# EAGLE board Drone (EAGLE 9.6.2)
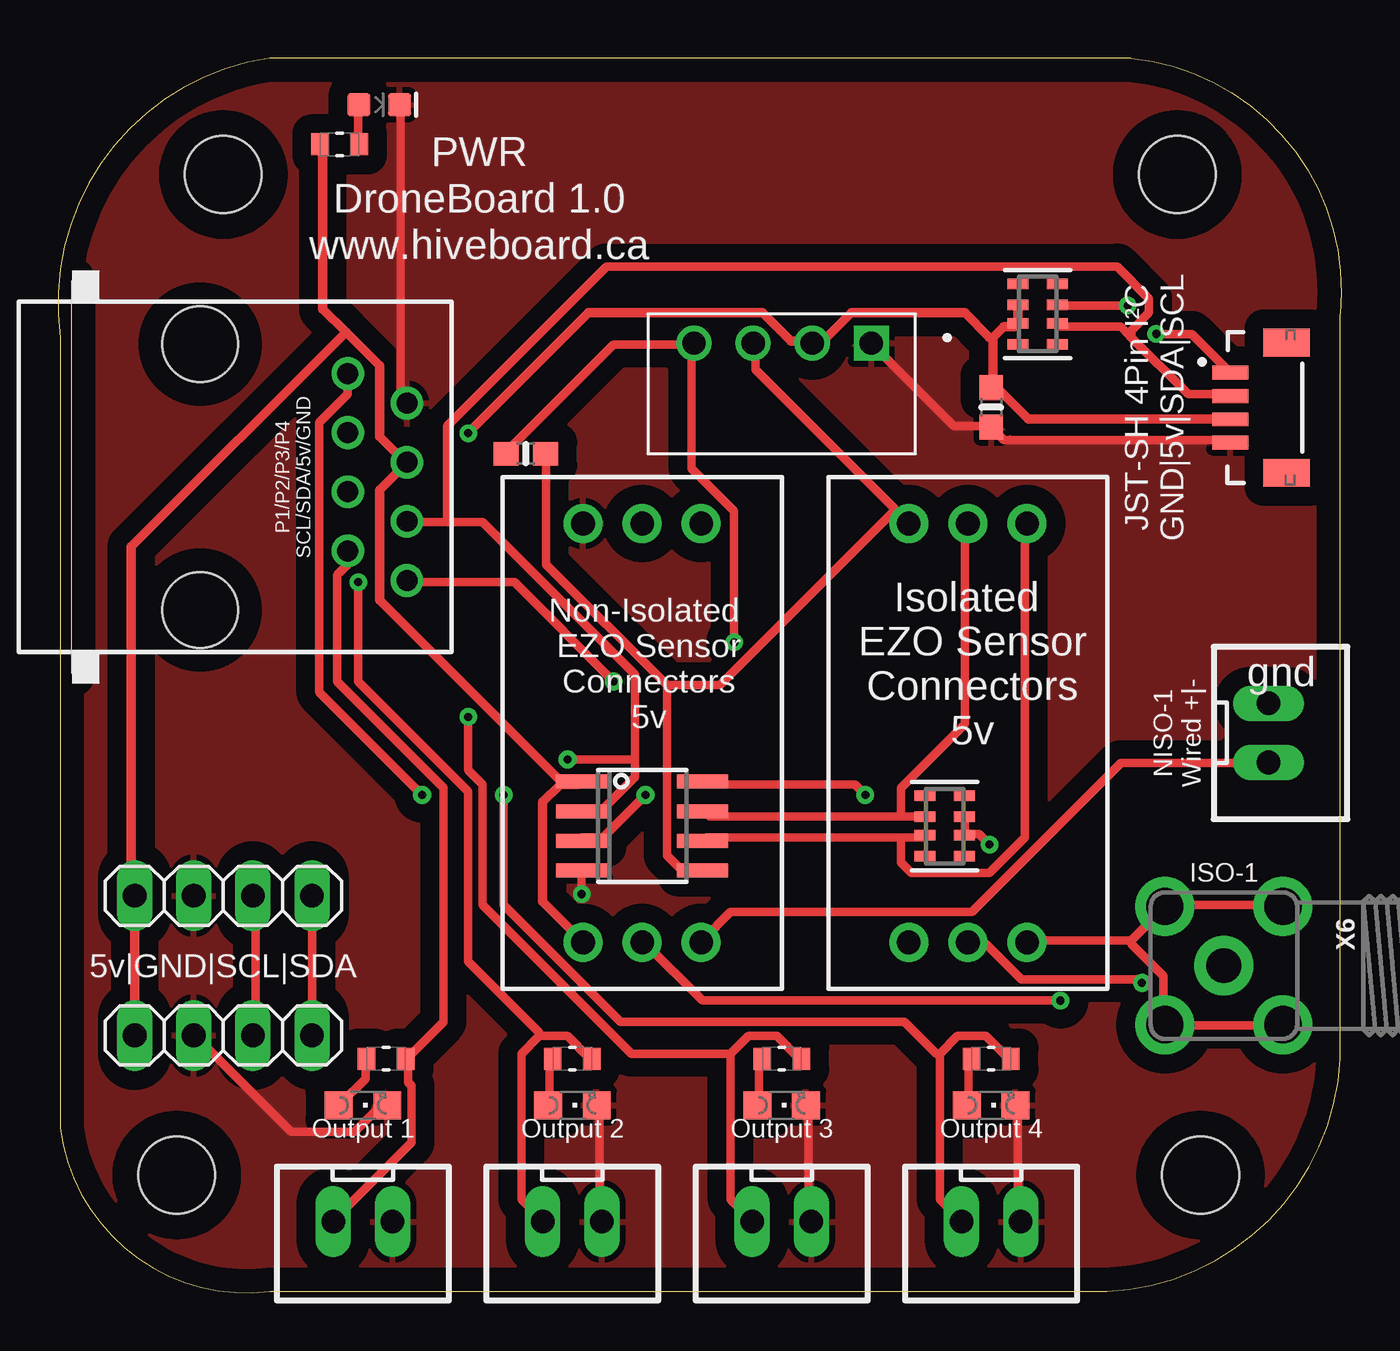
[diagram p0: board, top side]
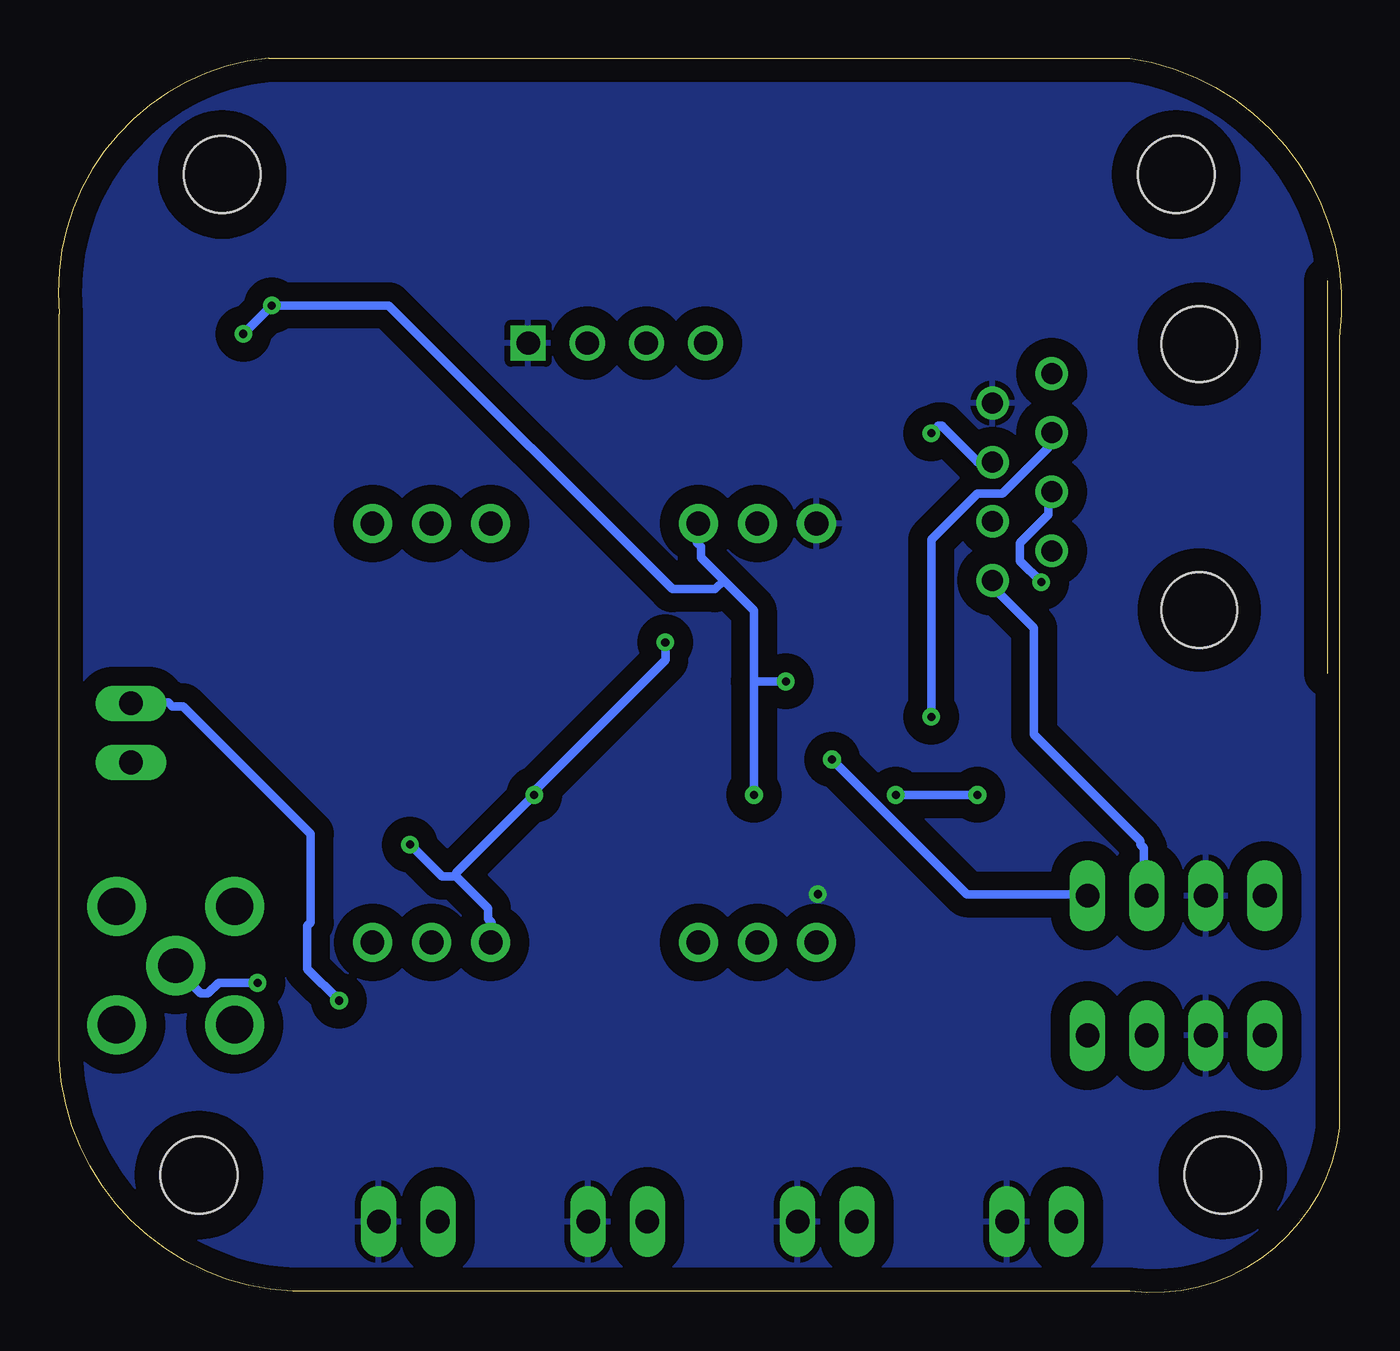
[diagram p1: board, bottom side, seen from below]

Size 55.15 x 53.06 mm. Coordinates in mm from the lower left corner, seen from the top.
Outline: 9.1,0.06 44.1,0.06 arc90 55.1,10.06 55.1,42.06 arc90 46.1,53.06 9.1,53.06 arc90 0.1,41.06 0.1,7.06 arc90 9.1,0.06
Copper layers (1*16): Top 0.035mm / dielectric 1.5mm / Bottom 0.035mm
Design rules "default *": minimum track width 6mil, minimum drill 0.35mm, track to track 6mil, track to pad 6mil, pad to pad 6mil, via to via 6mil, smd to smd 6mil, copper to edge 40mil, drill to drill 6mil, minimum pad ring 10mil, minimum via ring 8mil, stop-mask expansion 4mil, vias tented up to drill 0mil, thermal gap 10mil
Net classes: 0 default: width 0.356 mm, drill 0.102 mm, clearance 0.254 mm; 1 highpower: width 0.356 mm, drill 0.356 mm; 2 12v: width 0.457 mm, drill 0.102 mm, clearance 0.254 mm; 3 5v: width 0.406 mm, drill 0.102 mm, clearance 0.254 mm; 4 3.3v: width 0.406 mm, drill 0.102 mm, clearance 0.254 mm; 5 i2c: width 0.356 mm, drill 0.102 mm, clearance 0.254 mm; 6 GPIO: width 0.356 mm, drill 0.102 mm, clearance 0.254 mm; 8 New Class: drill 0.102 mm, clearance 0.152 mm

## Footprints (pad centres in the part's own frame; a part is rotated, then mirrored left to right if it is on the bottom)
RESC1608X60N = smd 0.762 x 0.94: 1 -0.838,0; 2 0.838,0
0603-NO = smd 1.075 x 1: 1 -0.85,0; 2 0.85,0
STAND-OFF = hole 3.302: 0,0
JST04_1MM_VERT = smd 0.6 x 1.55: 1 -1.478,0.775; 2 -0.478,0.775; 3 0.522,0.775; 4 1.522,0.775 | smd 1.2 x 2: NC1 -2.778,3.2; NC2 2.822,3.2
1X03-CLEANBIG = drill 1.016 pad 1.676: 1 -2.54,0; 2 0,0; 3 2.54,0
1X04 = drill 1.016 long: 1 -3.81,0; 2 -1.27,0; 3 1.27,0; 4 3.81,0
LED-0603 = smd 1 x 1: A -0.877,0; C 0.877,0
CHIPLED_0805 = smd 1.2 x 1.2: A 0,-1.05; C 0,1.05
CONV_RFM-0505S = drill 1 square: 1 -3.85,-1.75 | drill 1: 2 -1.31,-1.75; 3 1.23,-1.75; 4 3.77,-1.75
RJ45-NO-SHIELD = drill 0.9 pad 1.4: 1 -4.445,6.35; 2 -3.175,8.89; 3 -1.905,6.35; 4 -0.635,8.89; 5 0.635,6.35; 6 1.905,8.89; 7 3.175,6.35; 8 4.445,8.89 | hole 3.251: -5.715,0; 5.715,0
RESPACK_4X0603 = smd 0.45 x 0.9: 1 -1.3,-0.85; 2 -0.4,-0.85; 3 0.4,-0.85; 4 1.3,-0.85; 5 1.3,0.85; 6 0.4,0.85; 7 -0.4,0.85; 8 -1.3,0.85
JST-XH-02-PACKAGE-LONG-PAD = drill 1.016 long: 1 -1.27,0; 2 1.27,0
SMA90_DIP = drill 1.5 pad 2.54: ANTENNA 0,0 | drill 1.6 pad 2.54: GND1 -2.54,2.54; GND2 2.54,2.54; GND3 -2.54,-2.54; GND4 2.54,-2.54
SOIC8_150MIL = smd 0.6 x 2.2: 1 -1.905,-2.6; 2 -0.635,-2.6; 3 0.635,-2.6; 4 1.905,-2.6; 5 1.905,2.6; 6 0.635,2.6; 7 -0.635,2.6; 8 -1.905,2.6

## Placement (x,y rotation side)
12V  330R  [RESC1608X60N]  12.1,49.36 0 top
C6  0.1uF  [0603-NO]  20.1,36.06 0 top
C7  0.1uF  [0603-NO]  40.1,38.06 270 top
H5  STAND-OFF  [STAND-OFF]  7.1,48.06 0 top
H6  STAND-OFF  [STAND-OFF]  5.1,5.06 0 top
H7  STAND-OFF  [STAND-OFF]  49.1,5.06 0 top
H8  STAND-OFF  [STAND-OFF]  48.1,48.06 0 top
J4  Vertical Qwiic Connector  [JST04_1MM_VERT]  49.6,38.06 270 top
JP1  [1X03-CLEANBIG]  25.1,15.06 0 top
JP2  [1X04]  7.1,17.06 180 top
JP3  [1X03-CLEANBIG]  25.1,33.06 180 top
JP4  [1X04]  7.1,11.06 180 top
JP7  [1X03-CLEANBIG]  39.1,33.06 180 top
JP8  [1X03-CLEANBIG]  39.1,15.06 0 top
LED4  Red  [LED-0603]  13.8,51.06 0 top
LED11  BLUE  [CHIPLED_0805]  13.1,8.06 270 top
LED12  GREEN  [CHIPLED_0805]  22.1,8.06 270 top
LED13  Yellow  [CHIPLED_0805]  31.1,8.06 270 top
LED14  RED  [CHIPLED_0805]  40.1,8.06 270 top
PS1  RFM-0505S  [CONV_RFM-0505S]  31.1,39.06 180 top
PUMPBOX-2  RJ45-6L-B  [RJ45-NO-SHIELD]  6.1,35.06 270 top
R9  10K  [RESPACK_4X0603]  42.1,42.06 90 top
R10  10K  [RESPACK_4X0603]  38.1,20.06 270 top
R24  330R  [RESC1608X60N]  14.1,10.06 180 top
R25  330R  [RESC1608X60N]  22.1,10.06 180 top
R26  330R  [RESC1608X60N]  31.1,10.06 180 top
R27  330R  [RESC1608X60N]  40.1,10.06 180 top
X2  JST-XH-02-PIN-LONG-PAD  [JST-XH-02-PACKAGE-LONG-PAD]  13.1,3.06 180 top
X3  JST-XH-02-PIN-LONG-PAD  [JST-XH-02-PACKAGE-LONG-PAD]  22.1,3.06 180 top
X4  JST-XH-02-PIN-LONG-PAD  [JST-XH-02-PACKAGE-LONG-PAD]  31.1,3.06 180 top
X5  JST-XH-02-PIN-LONG-PAD  [JST-XH-02-PACKAGE-LONG-PAD]  40.1,3.06 180 top
X6  [SMA90_DIP]  50.1,14.06 270 top
X11  jst-xh-2  [JST-XH-02-PACKAGE-LONG-PAD]  52.02,24.06 270 top
X13  ISO154X  [SOIC8_150MIL]  25.1,20.06 270 top

## Library data of the parts
12V R24-R27 = Multicomp; MPN: MC0.063W06031%330R; OC_FARNELL: 9331018; OC_NEWARK: -; SUPPLIER: Multicomp; TOLERANCE: ±1%; WATTAGE: 1/16 W
C6 C7 R9 R10 = microbuilder
H5-H8 = SparkFun-Hardware
J4 = SparkFun-Connectors; PROD_ID: CONN-14483
JP1 JP3 JP7 JP8 LED11-LED14 X6 = adafruit
JP2 JP4 = pinhead
LED4 = SparkFun-LED; PROD_ID: DIO-16511
PS1 = RFM-0505S; AVAILABILITY: In Stock; DESCRIPTION: 1W DC/DC-Converter 'ECONOLINE' SIP4 1kV unreg; MF: Recom Power; MP: RFM-0505S; PACKAGE: SIP-4 Recom Power; PRICE: None; PURCHASE-URL: https://pricing.snapeda.com/search/part/RFM-0505S/?ref=eda
PUMPBOX-2 = con-tycoelectronics; MPN: RJ45-6L-B; OC_FARNELL: unknown; OC_NEWARK: 16R6090
X2-X5 X11 = Rembrandt Electronics - JST XH Connectors v1-0
X13 = adafruit_power

## Nets
12V-1: PUMPBOX-2.7 R24.1 X2.2
12V-2: PUMPBOX-2.5 R25.1 X3.2
12V-3: PUMPBOX-2.3 R26.1 X4.2
12V-4: PUMPBOX-2.1 R27.1 X5.2
+5V [5v]: 12V.1 C7.1 J4.3 JP1.1 JP2.4 JP4.4 PS1.2 PUMPBOX-2.4 R9.6 R9.7 X13.1
GND: C7.2 J4.4 JP2.3 JP3.3 JP4.3 LED4.C LED11.C LED12.C LED13.C LED14.C PS1.1 PUMPBOX-2.2 X2.1 X3.1 X4.1 X5.1 X13.4
ISO-1-5V: C6.1 JP8.1 PS1.4 R10.6 R10.7 X13.8
ISO-GND-1: C6.2 JP7.3 PS1.3 X13.5
N$1: JP1.2 X11.1
N$2: JP3.2
N$3: JP1.3 X11.2
N$14: JP8.3 X6.GND1 X6.GND2 X6.GND3 X6.GND4
N$16: JP8.2 X6.ANTENNA
N$47: 12V.2 LED4.A
N$54 [GPIO]: LED11.A R24.2
N$55 [GPIO]: LED12.A R25.2
N$56 [GPIO]: LED13.A R26.2
N$57 [GPIO]: LED14.A R27.2
SCL: J4.1 JP2.2 JP3.1 JP4.2 PUMPBOX-2.8 R9.3 X13.3
SCL2: JP7.1 R10.3 X13.6
SDA: J4.2 JP2.1 JP4.1 PUMPBOX-2.6 R9.2 X13.2
SDA2: JP7.2 R10.2 X13.7

## Tracks (layer width: path | path; a pad name or v marks a point on that pad's centre or on a via)
12V-1
  Top 0.356: X2.2 11.83,3.11 15.18,6.46 15.18,8.9 15.03,9.05 15.03,9.96 R24.1 15.03,10.12 16.56,11.64 16.56,21.7 11.98,26.27 11.98,30.84 12.44,31.3 12.44,31.76 PUMPBOX-2.7
12V-2  (via drill 0.35)
  Top 0.356: 20.67,11.03 21.89,11.03 22.8,10.12 R25.1 | 20.67,11.03 19.91,10.27 19.91,4.02 20.82,3.11 X3.2 | v12.9,30.54 12.9,26.27 17.62,21.55 17.62,14.23 20.67,11.18 20.67,11.03
  Bottom 0.356: v12.9,30.54 13.81,31.45 13.81,32.21 12.59,33.43 12.59,34.35 PUMPBOX-2.5
12V-3  (via drill 0.35)
  Top 0.356: 28.9,10.27 29.66,11.03 30.88,11.03 31.8,10.12 R26.1 | 28.9,10.27 28.9,4.02 29.81,3.11 X4.2 | v17.62,24.75 17.62,22.46 18.23,21.85 18.23,16.67 24.63,10.27 28.9,10.27
  Bottom 0.356: v17.62,24.75 17.62,32.37 15.64,34.35 14.57,34.35 12.59,36.33 12.59,36.94 PUMPBOX-2.3
12V-4  (via drill 0.35)
  Top 0.356: 37.89,10.27 38.65,11.03 39.87,11.03 40.79,10.12 R27.1 | 37.89,10.27 37.89,4.02 38.81,3.11 X5.2 | v15.64,21.39 11.22,25.81 11.22,37.4 12.44,38.62 12.44,39.38 PUMPBOX-2.1 | v19.15,21.39 19.15,16.67 24.18,11.64 36.37,11.64 37.74,10.27 37.89,10.27
  Bottom 0.356: v19.15,21.39 v15.64,21.39
+5V  (via drill 0.35)
  Top 0.406: R9.6 41.24,42.43 R9.7 41.09,41.51 40.63,41.51 40.18,41.05 | 40.18,41.05 40.18,38.92 C7.1 40.33,38.92 41.7,37.55 50.24,37.55 J4.3 | 40.18,41.05 40.03,41.05 38.96,42.12 34.08,42.12 32.86,40.9 32.56,40.9 PS1.2 32.25,40.9 31.49,40.9 30.27,42.12 22.8,42.12 v17.62,36.94 | JP1.1 22.5,15.15 20.82,16.82 20.82,21.09 21.58,21.85 22.35,21.85 X13.1 21.58,22 13.81,29.78 13.81,34.5 14.88,35.57 PUMPBOX-2.4 14.88,35.72 13.81,36.79 13.81,39.83 12.36,41.28 | JP4.4 3.3,11.18 3.3,16.97 JP2.4 3.14,17.13 3.14,32.06 12.36,41.28 | 12.36,41.28 11.37,42.27 11.37,49.28 12V.1
  Bottom 0.406: v17.62,36.94 17.32,37.24 17.17,37.24 15.64,35.72 15.03,35.72 PUMPBOX-2.4
GND  (via drill 0.35)
  Top 0.356: LED4.C 14.73,50.96 14.73,38.46 14.88,38.31 PUMPBOX-2.2 | PS1.1 35,40.75 38.5,37.24 40.03,37.24 C7.2 40.18,37.09 40.63,36.63 50.24,36.63 J4.4 | LED11.C 14.12,7.98 13.81,7.98 12.75,6.92 10,6.92 5.89,11.03 JP4.3 | LED12.C 23.26,7.98 23.26,3.11 X3.1 | LED13.C 32.25,7.98 32.25,3.11 X4.1 | LED14.C 41.24,7.98 41.24,3.11 X5.1 | v22.5,17.13 22.5,18.04 X13.4
  pour Bottom (isolate 0.813): 0.1,0.06 55.1,0.06 55.1,32.06 55.1,53.06 27.1,53.06 0.1,53.06
  pour Top (isolate 0.813): 0.1,0.06 55.1,0.06 55.1,34.06 55.1,53.06 22.1,53.06 0.1,53.06
ISO-1-5V  (via drill 0.35)
  Top 0.356: C6.1 19.3,36.18 23.87,40.75 27.22,40.75 PS1.4 27.22,40.6 27.22,35.42 29.05,33.59 v29.05,27.95 | R10.7 38.96,20.33 38.96,19.72 R10.6 39.11,19.72 39.57,19.72 v40.03,19.26 | v34.69,21.39 34.23,21.85 27.83,21.85 X13.8
  Bottom 0.356: v40.03,19.26 38.65,17.89 38.04,17.89 | 38.04,17.89 36.67,16.52 36.67,16.06 36.52,15.91 36.52,15.15 JP8.1 | 38.04,17.89 38.04,18.04 v34.69,21.39 34.69,21.55 29.05,27.19 v29.05,27.95
ISO-GND-1
  Top 0.356: PS1.3 29.97,40.75 29.97,39.68 36.52,33.13 JP7.3 35.91,33.59 28.44,26.12 26.16,26.12 | 26.16,26.12 20.98,31.3 20.98,36.02 C6.2 | 26.16,26.12 26.16,18.8 26.77,18.19 27.68,18.19 X13.5
N$1  (via drill 0.35)
  Top 0.356: v43.07,12.56 27.68,12.56 25.24,14.99 JP1.2
  Bottom 0.356: v43.07,12.56 44.44,13.93 44.44,15.76 44.29,15.91 44.29,19.72 49.78,25.2 50.24,25.2 50.39,25.36 51.91,25.36 X11.1
N$3
  Top 0.356: X11.2 51.91,22.77 45.66,22.77 39.26,16.37 28.9,16.37 27.68,15.15 JP1.3
N$14
  Top 0.356: 46.12,15.15 41.7,15.15 JP8.3 | 46.12,15.15 47.49,16.52 X6.GND3 47.65,16.67 52.52,16.67 X6.GND1 | 46.12,15.15 46.12,14.99 47.49,13.62 47.49,11.64 X6.GND4 47.65,11.49 52.52,11.49 X6.GND2
N$16  (via drill 0.35)
  Top 0.356: v46.58,13.32 46.43,13.47 41.4,13.47 39.87,14.99 39.11,14.99 JP8.2
  Bottom 0.356: v46.58,13.32 48.25,13.32 48.71,12.86 49.02,12.86 50.08,13.93 X6.ANTENNA
N$47
  Top 0.356: 12V.2 12.9,49.44 12.9,50.96 LED4.A
N$54
  Top 0.356: R24.2 13.2,9.96 13.2,9.2 12.14,8.14 LED11.A
N$55
  Top 0.356: R25.2 21.13,9.96 21.13,8.14 LED12.A
N$56
  Top 0.356: R26.2 30.12,9.96 30.12,8.14 LED13.A
N$57
  Top 0.356: R27.2 39.11,9.96 39.11,8.14 LED14.A
SCL  (via drill 0.35)
  Top 0.356: JP4.2 8.48,11.18 8.48,16.97 JP2.2 | v45.97,42.43 43.07,42.43 R9.3 | v47.19,41.21 48.71,41.21 50.24,39.68 J4.1 | v25.24,21.39 23.41,19.57 22.5,19.57 X13.3 | v23.87,26.27 19.6,30.54 15.03,30.54 PUMPBOX-2.8
  Bottom 0.356: v47.19,41.21 v45.97,42.43 40.94,42.43 28.75,30.23 26.92,30.23 26.54,30.61 | 25.24,26.27 25.24,29.32 26.54,30.61 | 25.24,26.27 v25.24,21.39 | 26.54,30.61 27.53,31.61 27.53,32.06 27.68,32.21 27.68,32.98 JP3.1 | 25.24,26.27 v23.87,26.27 | JP2.2 8.48,17.13 8.48,19.11 8.63,19.26 8.63,19.41 13.2,23.99 13.2,28.56 14.88,30.23 14.88,30.54 PUMPBOX-2.8
SCL2
  Top 0.356: 36.22,19.57 27.83,19.57 X13.6 | 36.22,19.57 37.13,19.57 R10.3 | 36.22,19.57 36.22,18.5 36.67,18.04 40.03,18.04 41.55,19.57 41.55,32.98 JP7.1
SDA  (via drill 0.35)
  Top 0.356: JP4.1 10.92,11.18 10.92,16.97 JP2.1 | 46.05,41.13 48.56,38.62 50.24,38.62 J4.2 | 46.05,41.13 45.66,41.51 43.07,41.51 R9.2 | 24.79,22.92 24.79,26.58 18.23,33.13 16.71,33.13 | 24.79,22.92 24.79,22.16 23.41,20.78 22.5,20.78 X13.2 | 16.71,33.13 15.03,33.13 PUMPBOX-2.6 | 16.71,33.13 16.71,37.24 23.57,44.1 45.51,44.1 46.88,42.73 46.88,42.12 46.12,41.36 46.12,41.21 46.05,41.13 | 24.79,22.92 v21.89,22.92
  Bottom 0.356: v21.89,22.92 16.1,17.13 10.92,17.13 JP2.1
SDA2
  Top 0.356: 36.22,20.48 27.99,20.48 27.83,20.63 X13.7 | 36.22,20.48 37.13,20.48 R10.2 | 36.22,20.48 36.22,21.7 38.96,24.44 38.96,32.98 JP7.2

## Text on the board
tPlace: PWR | DroneBoard 1.0 | www.hiveboard.ca | JST-SH 4Pin I²C / GND|5v|SDA|SCL | P1/P2/P3/P4 / SCL/SDA/5v/GND | Non-Isolated / EZO Sensor / Connectors / 5v | Isolated / EZO Sensor / Connectors / 5v | gnd | NISO-1 / Wired +|- | ISO-1 | 5v|GND|SCL|SDA | Output 1 | Output 2 | Output 3 | Output 4